# EAGLE board hyperion (EAGLE 5.10), part 1 of 4
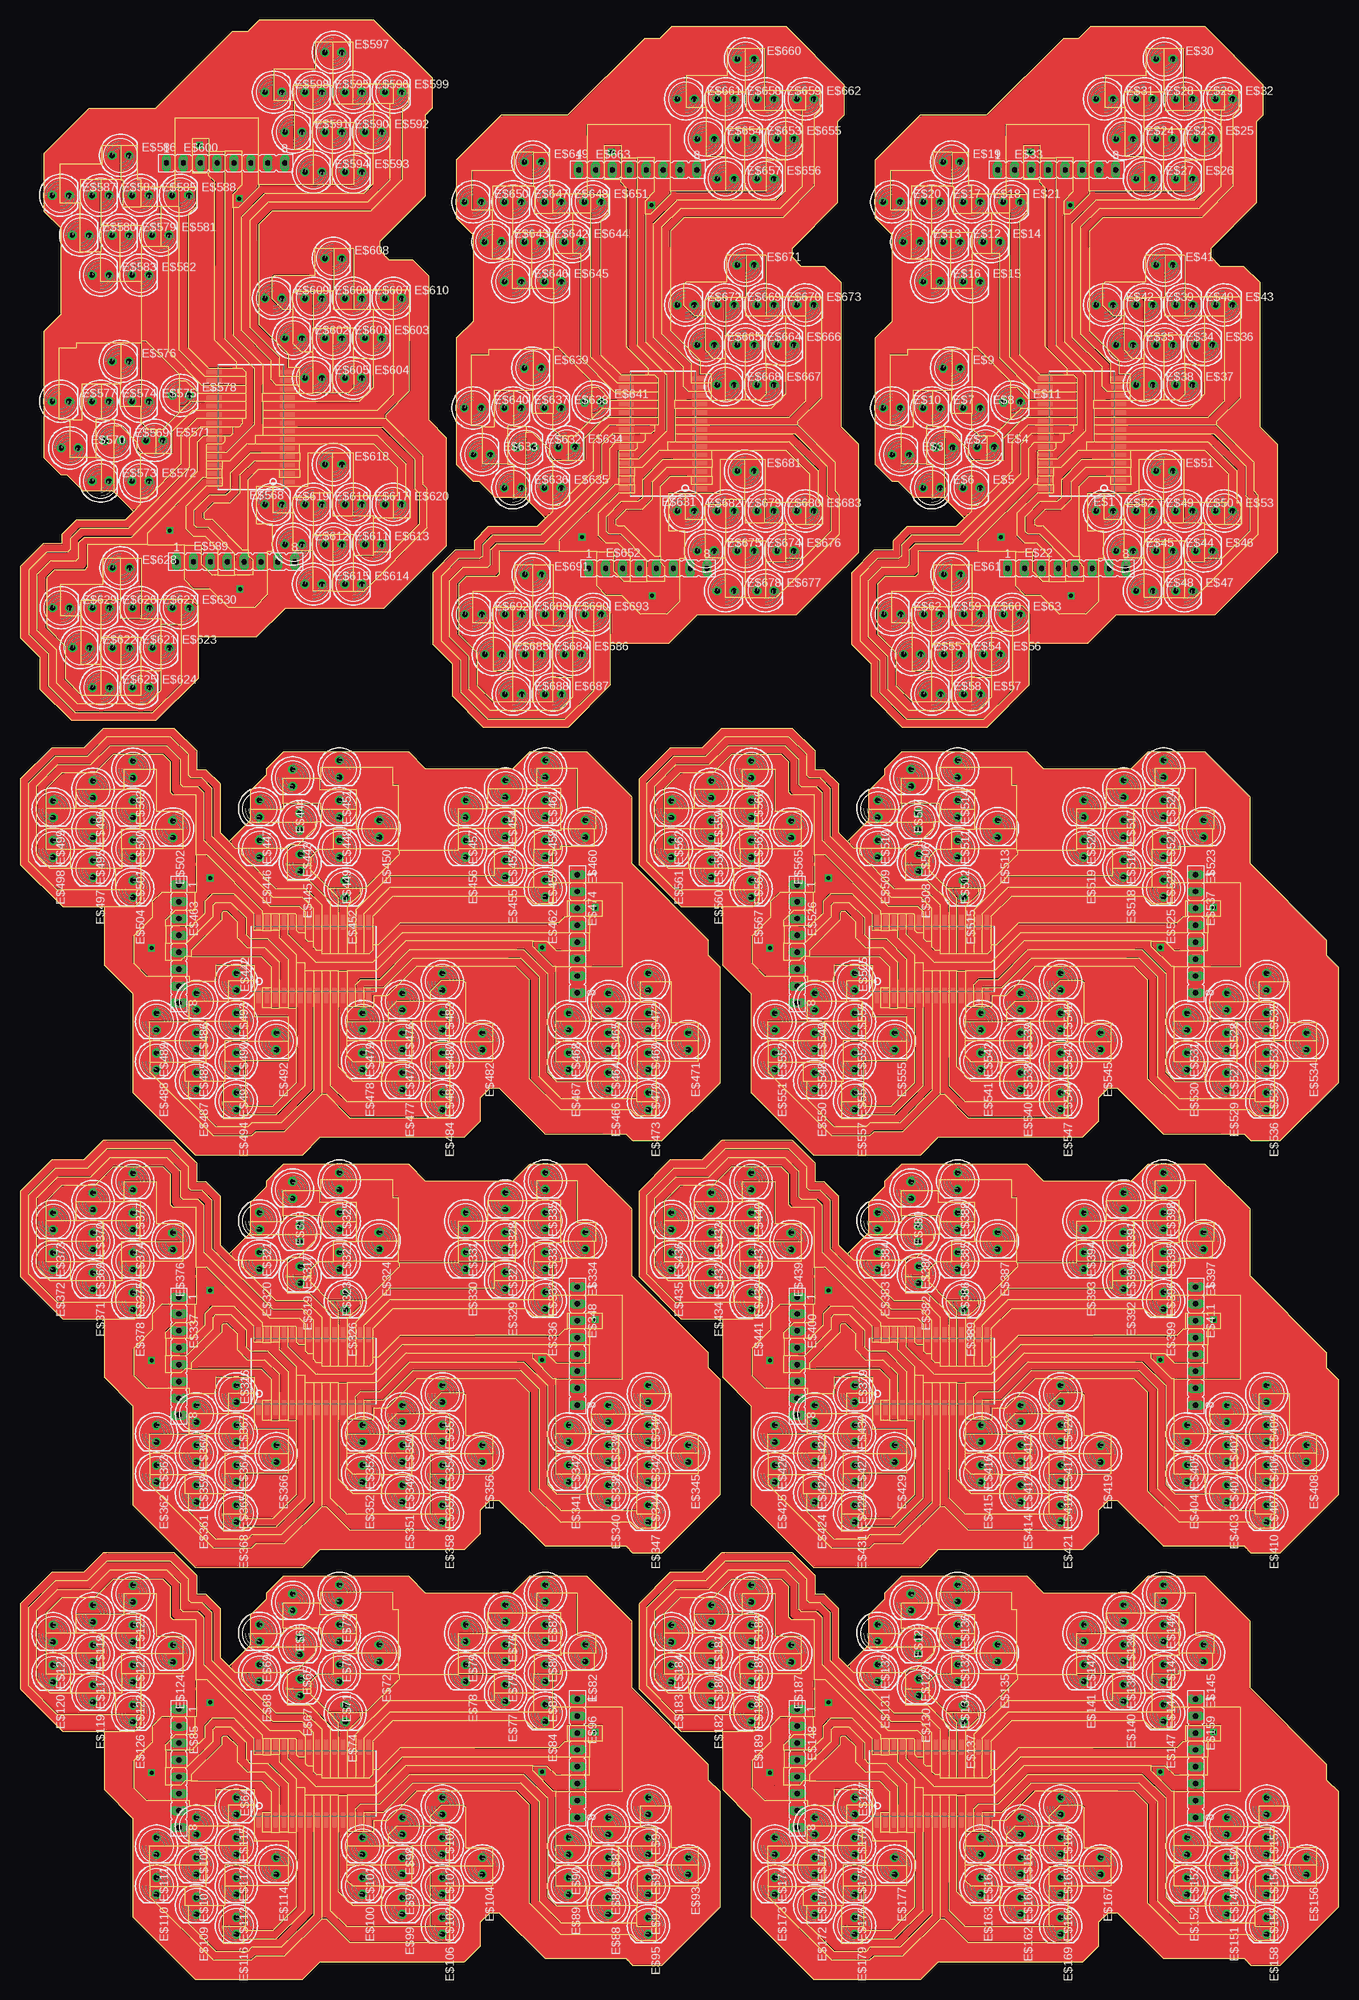
[diagram p0: board, top side]

Size 198.31 x 294.66 mm. Coordinates in mm from the lower left corner, seen from the top.
Outline: 4923 segments
Copper layers (1*16): Top 0.035mm / dielectric 1.5mm / Bottom 0.035mm
Design rules "default": minimum track width 10mil, minimum drill 24mil, track to track 8mil, track to pad 8mil, pad to pad 8mil, via to via 8mil, smd to smd 8mil, copper to edge 40mil, drill to drill 8mil, minimum pad ring 10mil, minimum via ring 8mil, stop-mask expansion 4mil, vias tented up to drill 0mil, thermal gap 10mil

## Footprints (pad centres in the part's own frame; a part is rotated, then mirrored left to right if it is on the bottom)
SOP28 = smd 0.6 x 2.2: 1 -8.255,-5.5; 2 -6.985,-5.5; 3 -5.715,-5.5; 4 -4.445,-5.5; 5 -3.175,-5.5; 6 -1.905,-5.5; 7 -0.635,-5.5; 8 0.635,-5.5; 9 1.905,-5.5; 10 3.175,-5.5; 11 4.445,-5.5; 12 5.715,-5.5; 13 6.985,-5.5; 14 8.255,-5.5; 15 8.255,5.5; 16 6.985,5.5; 17 5.715,5.5; 18 4.445,5.5; 19 3.175,5.5; 20 1.905,5.5; 21 0.635,5.5; 22 -0.635,5.5; 23 -1.905,5.5; 24 -3.175,5.5; 25 -4.445,5.5; 26 -5.715,5.5; 27 -6.985,5.5; 28 -8.255,5.5
LED5MM = drill 0.813 octagon: A -1.27,0; K 1.27,0
FE08 = drill 0.813 long: 1 -8.89,0; 2 -6.35,0; 3 -3.81,0; 4 -1.27,0; 5 1.27,0; 6 3.81,0; 7 6.35,0; 8 8.89,0

## Placement (x,y rotation side)
E$1  [SOP28]  159.67,232.45 90 top
E$2  [LED5MM]  138.99,230.4 0 top
E$3  [LED5MM]  132.42,229.32 0 top
E$4  [LED5MM]  145.18,230.46 0 top
E$5  [LED5MM]  143.07,224.34 0 top
E$6  [LED5MM]  137.07,224.34 0 top
E$7  [LED5MM]  137.07,236.34 0 top
E$8  [LED5MM]  143.07,236.34 0 top
E$9  [LED5MM]  140.07,242.34 0 top
E$10  [LED5MM]  131.07,236.34 0 top
E$11  [LED5MM]  149.13,237.23 0 top
E$12  [LED5MM]  140.07,261.32 0 top
E$13  [LED5MM]  134.07,261.32 0 top
E$14  [LED5MM]  146.07,261.32 0 top
E$15  [LED5MM]  143.07,255.33 0 top
E$16  [LED5MM]  137.07,255.33 0 top
E$17  [LED5MM]  137.07,267.32 0 top
E$18  [LED5MM]  143.07,267.32 0 top
E$19  [LED5MM]  140.07,273.32 0 top
E$20  [LED5MM]  131.07,267.32 0 top
E$21  [LED5MM]  149.07,267.32 0 top
E$22  [FE08]  157.4,212.21 0 top
E$23  [LED5MM]  172.07,276.82 0 top
E$24  [LED5MM]  166.07,276.82 0 top
E$25  [LED5MM]  178.07,276.82 0 top
E$26  [LED5MM]  175.07,270.82 0 top
E$27  [LED5MM]  169.07,270.82 0 top
E$28  [LED5MM]  169.07,282.82 0 top
E$29  [LED5MM]  175.07,282.82 0 top
E$30  [LED5MM]  172.07,288.82 0 top
E$31  [LED5MM]  163.07,282.82 0 top
E$32  [LED5MM]  181.07,282.82 0 top
E$33  [FE08]  155.88,272.16 0 top
E$34  [LED5MM]  172.07,245.83 0 top
E$35  [LED5MM]  166.07,245.83 0 top
E$36  [LED5MM]  178.07,245.83 0 top
E$37  [LED5MM]  175.07,239.83 0 top
E$38  [LED5MM]  169.07,239.83 0 top
E$39  [LED5MM]  169.07,251.83 0 top
E$40  [LED5MM]  175.07,251.83 0 top
E$41  [LED5MM]  172.07,257.83 0 top
E$42  [LED5MM]  163.07,251.83 0 top
E$43  [LED5MM]  181.07,251.83 0 top
E$44  [LED5MM]  172.07,214.84 0 top
E$45  [LED5MM]  166.07,214.84 0 top
E$46  [LED5MM]  178.07,214.84 0 top
E$47  [LED5MM]  175.07,208.84 0 top
E$48  [LED5MM]  169.07,208.84 0 top
E$49  [LED5MM]  169.07,220.84 0 top
E$50  [LED5MM]  175.07,220.84 0 top
E$51  [LED5MM]  172.07,226.84 0 top
E$52  [LED5MM]  163.07,220.84 0 top
E$53  [LED5MM]  181.07,220.84 0 top
E$54  [LED5MM]  140.13,199.29 0 top
E$55  [LED5MM]  134.13,199.29 0 top
E$56  [LED5MM]  146.13,199.29 0 top
E$57  [LED5MM]  143.13,193.29 0 top
E$58  [LED5MM]  137.13,193.29 0 top
E$59  [LED5MM]  137.13,205.29 0 top
E$60  [LED5MM]  143.13,205.29 0 top
E$61  [LED5MM]  140.13,211.29 0 top
E$62  [LED5MM]  131.13,205.29 0 top
E$63  [LED5MM]  149.13,205.29 0 top
E$64  [SOP28]  44.1,29.47 0 top
E$65  [LED5MM]  42.04,50.15 270 top
E$66  [LED5MM]  40.96,56.72 270 top
E$67  [LED5MM]  42.11,43.96 270 top
E$68  [LED5MM]  35.98,46.07 270 top
E$69  [LED5MM]  35.98,52.07 270 top
E$70  [LED5MM]  47.98,52.07 270 top
E$71  [LED5MM]  47.98,46.07 270 top
E$72  [LED5MM]  53.98,49.07 270 top
E$73  [LED5MM]  47.98,58.07 270 top
E$74  [LED5MM]  48.87,40 270 top
E$75  [LED5MM]  72.97,49.07 270 top
E$76  [LED5MM]  72.97,55.07 270 top
E$77  [LED5MM]  72.97,43.07 270 top
E$78  [LED5MM]  66.97,46.07 270 top
E$79  [LED5MM]  66.97,52.07 270 top
E$80  [LED5MM]  78.97,52.07 270 top
E$81  [LED5MM]  78.97,46.07 270 top
E$82  [LED5MM]  84.97,49.07 270 top
E$83  [LED5MM]  78.97,58.07 270 top
E$84  [LED5MM]  78.97,40.07 270 top
E$85  [FE08]  23.86,31.74 270 top
E$86  [LED5MM]  88.46,17.06 270 top
E$87  [LED5MM]  88.46,23.06 270 top
E$88  [LED5MM]  88.46,11.06 270 top
E$89  [LED5MM]  82.46,14.06 270 top
E$90  [LED5MM]  82.46,20.06 270 top
E$91  [LED5MM]  94.46,20.06 270 top
E$92  [LED5MM]  94.46,14.06 270 top
E$93  [LED5MM]  100.46,17.06 270 top
E$94  [LED5MM]  94.46,26.06 270 top
E$95  [LED5MM]  94.46,8.06 270 top
E$96  [FE08]  83.8,33.26 270 top
E$97  [LED5MM]  57.47,17.06 270 top
E$98  [LED5MM]  57.47,23.06 270 top
E$99  [LED5MM]  57.47,11.06 270 top
E$100  [LED5MM]  51.47,14.06 270 top
E$101  [LED5MM]  51.47,20.06 270 top
E$102  [LED5MM]  63.47,20.06 270 top
E$103  [LED5MM]  63.47,14.06 270 top
E$104  [LED5MM]  69.47,17.06 270 top
E$105  [LED5MM]  63.47,26.06 270 top
E$106  [LED5MM]  63.47,8.06 270 top
E$107  [LED5MM]  26.49,17.06 270 top
E$108  [LED5MM]  26.49,23.06 270 top
E$109  [LED5MM]  26.49,11.06 270 top
E$110  [LED5MM]  20.49,14.06 270 top
E$111  [LED5MM]  20.49,20.06 270 top
E$112  [LED5MM]  32.49,20.06 270 top
E$113  [LED5MM]  32.49,14.06 270 top
E$114  [LED5MM]  38.49,17.06 270 top
E$115  [LED5MM]  32.49,26.06 270 top
E$116  [LED5MM]  32.49,8.06 270 top
E$117  [LED5MM]  10.93,49 270 top
E$118  [LED5MM]  10.93,55 270 top
E$119  [LED5MM]  10.93,43 270 top
E$120  [LED5MM]  4.93,46 270 top
E$121  [LED5MM]  4.93,52 270 top
E$122  [LED5MM]  16.93,52 270 top
E$123  [LED5MM]  16.93,46 270 top
E$124  [LED5MM]  22.93,49 270 top
E$125  [LED5MM]  16.93,58 270 top
E$126  [LED5MM]  16.93,40 270 top
E$127  [SOP28]  137.1,29.47 0 top
E$128  [LED5MM]  135.04,50.15 270 top
E$129  [LED5MM]  133.96,56.72 270 top
E$130  [LED5MM]  135.11,43.96 270 top
E$131  [LED5MM]  128.98,46.07 270 top
E$132  [LED5MM]  128.98,52.07 270 top
E$133  [LED5MM]  140.98,52.07 270 top
E$134  [LED5MM]  140.98,46.07 270 top
E$135  [LED5MM]  146.98,49.07 270 top
E$136  [LED5MM]  140.98,58.07 270 top
E$137  [LED5MM]  141.87,40 270 top
E$138  [LED5MM]  165.97,49.07 270 top
E$139  [LED5MM]  165.97,55.07 270 top
E$140  [LED5MM]  165.97,43.07 270 top
E$141  [LED5MM]  159.97,46.07 270 top
E$142  [LED5MM]  159.97,52.07 270 top
E$143  [LED5MM]  171.97,52.07 270 top
E$144  [LED5MM]  171.97,46.07 270 top
E$145  [LED5MM]  177.97,49.07 270 top
E$146  [LED5MM]  171.97,58.07 270 top
E$147  [LED5MM]  171.97,40.07 270 top
E$148  [FE08]  116.85,31.74 270 top
E$149  [LED5MM]  181.46,17.06 270 top
E$150  [LED5MM]  181.46,23.06 270 top
E$151  [LED5MM]  181.46,11.06 270 top
E$152  [LED5MM]  175.46,14.06 270 top
E$153  [LED5MM]  175.46,20.06 270 top
E$154  [LED5MM]  187.46,20.06 270 top
E$155  [LED5MM]  187.46,14.06 270 top
E$156  [LED5MM]  193.46,17.06 270 top
E$157  [LED5MM]  187.46,26.06 270 top
E$158  [LED5MM]  187.46,8.06 270 top
E$159  [FE08]  176.8,33.26 270 top
E$160  [LED5MM]  150.47,17.06 270 top
E$161  [LED5MM]  150.47,23.06 270 top
E$162  [LED5MM]  150.47,11.06 270 top
E$163  [LED5MM]  144.47,14.06 270 top
E$164  [LED5MM]  144.47,20.06 270 top
E$165  [LED5MM]  156.47,20.06 270 top
E$166  [LED5MM]  156.47,14.06 270 top
E$167  [LED5MM]  162.47,17.06 270 top
E$168  [LED5MM]  156.47,26.06 270 top
E$169  [LED5MM]  156.47,8.06 270 top
E$170  [LED5MM]  119.49,17.06 270 top
E$171  [LED5MM]  119.49,23.06 270 top
E$172  [LED5MM]  119.49,11.06 270 top
E$173  [LED5MM]  113.49,14.06 270 top
E$174  [LED5MM]  113.49,20.06 270 top
E$175  [LED5MM]  125.49,20.06 270 top
E$176  [LED5MM]  125.49,14.06 270 top
E$177  [LED5MM]  131.49,17.06 270 top
E$178  [LED5MM]  125.49,26.06 270 top
E$179  [LED5MM]  125.49,8.06 270 top
E$180  [LED5MM]  103.93,49 270 top
E$181  [LED5MM]  103.93,55 270 top
E$182  [LED5MM]  103.93,43 270 top
E$183  [LED5MM]  97.93,46 270 top
E$184  [LED5MM]  97.93,52 270 top
E$185  [LED5MM]  109.93,52 270 top
E$186  [LED5MM]  109.93,46 270 top
E$187  [LED5MM]  115.93,49 270 top
E$188  [LED5MM]  109.93,58 270 top
E$189  [LED5MM]  109.93,40 270 top
E$316  [SOP28]  44.1,91.47 0 top
E$317  [LED5MM]  42.04,112.15 270 top
E$318  [LED5MM]  40.96,118.72 270 top
E$319  [LED5MM]  42.11,105.95 270 top
E$320  [LED5MM]  35.98,108.07 270 top
E$321  [LED5MM]  35.98,114.07 270 top
E$322  [LED5MM]  47.98,114.07 270 top
E$323  [LED5MM]  47.98,108.07 270 top
E$324  [LED5MM]  53.98,111.07 270 top
E$325  [LED5MM]  47.98,120.07 270 top
E$326  [LED5MM]  48.87,102 270 top
E$327  [LED5MM]  72.97,111.07 270 top
E$328  [LED5MM]  72.97,117.07 270 top
E$329  [LED5MM]  72.97,105.07 270 top
E$330  [LED5MM]  66.97,108.07 270 top
E$331  [LED5MM]  66.97,114.07 270 top
E$332  [LED5MM]  78.97,114.07 270 top
E$333  [LED5MM]  78.97,108.07 270 top
E$334  [LED5MM]  84.97,111.07 270 top
E$335  [LED5MM]  78.97,120.07 270 top
E$336  [LED5MM]  78.97,102.07 270 top
E$337  [FE08]  23.86,93.74 270 top
E$338  [LED5MM]  88.46,79.06 270 top
E$339  [LED5MM]  88.46,85.06 270 top
E$340  [LED5MM]  88.46,73.06 270 top
E$341  [LED5MM]  82.46,76.06 270 top
E$342  [LED5MM]  82.46,82.06 270 top
E$343  [LED5MM]  94.46,82.06 270 top
E$344  [LED5MM]  94.46,76.06 270 top
E$345  [LED5MM]  100.46,79.06 270 top
E$346  [LED5MM]  94.46,88.06 270 top
E$347  [LED5MM]  94.46,70.06 270 top
E$348  [FE08]  83.8,95.26 270 top
E$349  [LED5MM]  57.47,79.06 270 top
E$350  [LED5MM]  57.47,85.06 270 top
E$351  [LED5MM]  57.47,73.06 270 top
E$352  [LED5MM]  51.47,76.06 270 top
E$353  [LED5MM]  51.47,82.06 270 top
E$354  [LED5MM]  63.47,82.06 270 top
E$355  [LED5MM]  63.47,76.06 270 top
E$356  [LED5MM]  69.47,79.06 270 top
E$357  [LED5MM]  63.47,88.06 270 top
E$358  [LED5MM]  63.47,70.06 270 top
E$359  [LED5MM]  26.49,79.06 270 top
E$360  [LED5MM]  26.49,85.06 270 top
E$361  [LED5MM]  26.49,73.06 270 top
E$362  [LED5MM]  20.49,76.06 270 top
E$363  [LED5MM]  20.49,82.06 270 top
E$364  [LED5MM]  32.49,82.06 270 top
E$365  [LED5MM]  32.49,76.06 270 top
E$366  [LED5MM]  38.49,79.06 270 top
E$367  [LED5MM]  32.49,88.06 270 top
E$368  [LED5MM]  32.49,70.06 270 top
E$369  [LED5MM]  10.93,111 270 top
E$370  [LED5MM]  10.93,117 270 top
E$371  [LED5MM]  10.93,105 270 top
E$372  [LED5MM]  4.93,108 270 top
E$373  [LED5MM]  4.93,114 270 top
E$374  [LED5MM]  16.93,114 270 top
E$375  [LED5MM]  16.93,108 270 top
E$376  [LED5MM]  22.93,111 270 top
E$377  [LED5MM]  16.93,120 270 top
E$378  [LED5MM]  16.93,102 270 top
E$379  [SOP28]  137.1,91.47 0 top
E$380  [LED5MM]  135.04,112.15 270 top
E$381  [LED5MM]  133.96,118.72 270 top
E$382  [LED5MM]  135.11,105.95 270 top
E$383  [LED5MM]  128.98,108.07 270 top
E$384  [LED5MM]  128.98,114.07 270 top
E$385  [LED5MM]  140.98,114.07 270 top
E$386  [LED5MM]  140.98,108.07 270 top
E$387  [LED5MM]  146.98,111.07 270 top
E$388  [LED5MM]  140.98,120.07 270 top
E$389  [LED5MM]  141.87,102 270 top
E$390  [LED5MM]  165.97,111.07 270 top
E$391  [LED5MM]  165.97,117.07 270 top
E$392  [LED5MM]  165.97,105.07 270 top
E$393  [LED5MM]  159.97,108.07 270 top
E$394  [LED5MM]  159.97,114.07 270 top
E$395  [LED5MM]  171.97,114.07 270 top
E$396  [LED5MM]  171.97,108.07 270 top
E$397  [LED5MM]  177.97,111.07 270 top
E$398  [LED5MM]  171.97,120.07 270 top
E$399  [LED5MM]  171.97,102.07 270 top
E$400  [FE08]  116.85,93.74 270 top
E$401  [LED5MM]  181.46,79.06 270 top
E$402  [LED5MM]  181.46,85.06 270 top
E$403  [LED5MM]  181.46,73.06 270 top
E$404  [LED5MM]  175.46,76.06 270 top
E$405  [LED5MM]  175.46,82.06 270 top
E$406  [LED5MM]  187.46,82.06 270 top
E$407  [LED5MM]  187.46,76.06 270 top
E$408  [LED5MM]  193.46,79.06 270 top
E$409  [LED5MM]  187.46,88.06 270 top
E$410  [LED5MM]  187.46,70.06 270 top
E$411  [FE08]  176.8,95.26 270 top
E$412  [LED5MM]  150.47,79.06 270 top
E$413  [LED5MM]  150.47,85.06 270 top
E$414  [LED5MM]  150.47,73.06 270 top
E$415  [LED5MM]  144.47,76.06 270 top
E$416  [LED5MM]  144.47,82.06 270 top
E$417  [LED5MM]  156.47,82.06 270 top
E$418  [LED5MM]  156.47,76.06 270 top
E$419  [LED5MM]  162.47,79.06 270 top
E$420  [LED5MM]  156.47,88.06 270 top
E$421  [LED5MM]  156.47,70.06 270 top
E$422  [LED5MM]  119.49,79.06 270 top
E$423  [LED5MM]  119.49,85.06 270 top
E$424  [LED5MM]  119.49,73.06 270 top
E$425  [LED5MM]  113.49,76.06 270 top
E$426  [LED5MM]  113.49,82.06 270 top
E$427  [LED5MM]  125.49,82.06 270 top
E$428  [LED5MM]  125.49,76.06 270 top
E$429  [LED5MM]  131.49,79.06 270 top
E$430  [LED5MM]  125.49,88.06 270 top
E$431  [LED5MM]  125.49,70.06 270 top
E$432  [LED5MM]  103.93,111 270 top
E$433  [LED5MM]  103.93,117 270 top
E$434  [LED5MM]  103.93,105 270 top
E$435  [LED5MM]  97.93,108 270 top
E$436  [LED5MM]  97.93,114 270 top
E$437  [LED5MM]  109.93,114 270 top
E$438  [LED5MM]  109.93,108 270 top
E$439  [LED5MM]  115.93,111 270 top
E$440  [LED5MM]  109.93,120 270 top
E$441  [LED5MM]  109.93,102 270 top
E$442  [SOP28]  44.1,153.47 0 top
E$443  [LED5MM]  42.04,174.15 270 top
E$444  [LED5MM]  40.96,180.72 270 top
E$445  [LED5MM]  42.11,167.96 270 top
E$446  [LED5MM]  35.98,170.07 270 top
E$447  [LED5MM]  35.98,176.07 270 top
E$448  [LED5MM]  47.98,176.07 270 top
E$449  [LED5MM]  47.98,170.07 270 top
E$450  [LED5MM]  53.98,173.07 270 top
E$451  [LED5MM]  47.98,182.07 270 top
E$452  [LED5MM]  48.87,164 270 top
E$453  [LED5MM]  72.97,173.07 270 top
E$454  [LED5MM]  72.97,179.07 270 top
E$455  [LED5MM]  72.97,167.07 270 top
E$456  [LED5MM]  66.97,170.07 270 top
E$457  [LED5MM]  66.97,176.07 270 top
E$458  [LED5MM]  78.97,176.07 270 top
E$459  [LED5MM]  78.97,170.07 270 top
E$460  [LED5MM]  84.97,173.07 270 top
E$461  [LED5MM]  78.97,182.07 270 top
E$462  [LED5MM]  78.97,164.07 270 top
E$463  [FE08]  23.86,155.74 270 top
E$464  [LED5MM]  88.46,141.06 270 top
E$465  [LED5MM]  88.46,147.06 270 top
E$466  [LED5MM]  88.46,135.06 270 top
E$467  [LED5MM]  82.46,138.06 270 top
E$468  [LED5MM]  82.46,144.06 270 top
E$469  [LED5MM]  94.46,144.06 270 top
E$470  [LED5MM]  94.46,138.06 270 top
E$471  [LED5MM]  100.46,141.06 270 top
E$472  [LED5MM]  94.46,150.06 270 top
E$473  [LED5MM]  94.46,132.06 270 top
E$474  [FE08]  83.8,157.26 270 top
E$475  [LED5MM]  57.47,141.06 270 top
E$476  [LED5MM]  57.47,147.06 270 top
E$477  [LED5MM]  57.47,135.06 270 top
E$478  [LED5MM]  51.47,138.06 270 top
E$479  [LED5MM]  51.47,144.06 270 top
E$480  [LED5MM]  63.47,144.06 270 top
E$481  [LED5MM]  63.47,138.06 270 top
E$482  [LED5MM]  69.47,141.06 270 top
E$483  [LED5MM]  63.47,150.06 270 top
E$484  [LED5MM]  63.47,132.06 270 top
E$485  [LED5MM]  26.49,141.06 270 top
E$486  [LED5MM]  26.49,147.06 270 top
E$487  [LED5MM]  26.49,135.06 270 top
E$488  [LED5MM]  20.49,138.06 270 top
E$489  [LED5MM]  20.49,144.06 270 top
E$490  [LED5MM]  32.49,144.06 270 top
E$491  [LED5MM]  32.49,138.06 270 top
E$492  [LED5MM]  38.49,141.06 270 top
E$493  [LED5MM]  32.49,150.06 270 top
E$494  [LED5MM]  32.49,132.06 270 top
E$495  [LED5MM]  10.93,173 270 top
E$496  [LED5MM]  10.93,179 270 top
E$497  [LED5MM]  10.93,167 270 top
E$498  [LED5MM]  4.93,170 270 top
E$499  [LED5MM]  4.93,176 270 top
E$500  [LED5MM]  16.93,176 270 top
E$501  [LED5MM]  16.93,170 270 top
E$502  [LED5MM]  22.93,173 270 top
E$503  [LED5MM]  16.93,182 270 top
E$504  [LED5MM]  16.93,164 270 top
E$505  [SOP28]  137.1,153.47 0 top
E$506  [LED5MM]  135.04,174.15 270 top
E$507  [LED5MM]  133.96,180.72 270 top
E$508  [LED5MM]  135.11,167.96 270 top
E$509  [LED5MM]  128.98,170.07 270 top
E$510  [LED5MM]  128.98,176.07 270 top
E$511  [LED5MM]  140.98,176.07 270 top
E$512  [LED5MM]  140.98,170.07 270 top
E$513  [LED5MM]  146.98,173.07 270 top
E$514  [LED5MM]  140.98,182.07 270 top
E$515  [LED5MM]  141.87,164 270 top
E$516  [LED5MM]  165.97,173.07 270 top
E$517  [LED5MM]  165.97,179.07 270 top
E$518  [LED5MM]  165.97,167.07 270 top
E$519  [LED5MM]  159.97,170.07 270 top
E$520  [LED5MM]  159.97,176.07 270 top
E$521  [LED5MM]  171.97,176.07 270 top
E$522  [LED5MM]  171.97,170.07 270 top
E$523  [LED5MM]  177.97,173.07 270 top
E$524  [LED5MM]  171.97,182.07 270 top
E$525  [LED5MM]  171.97,164.07 270 top
E$526  [FE08]  116.85,155.74 270 top
E$527  [LED5MM]  181.46,141.06 270 top
E$528  [LED5MM]  181.46,147.06 270 top
E$529  [LED5MM]  181.46,135.06 270 top
E$530  [LED5MM]  175.46,138.06 270 top
E$531  [LED5MM]  175.46,144.06 270 top
E$532  [LED5MM]  187.46,144.06 270 top
E$533  [LED5MM]  187.46,138.06 270 top
E$534  [LED5MM]  193.46,141.06 270 top
E$535  [LED5MM]  187.46,150.06 270 top
E$536  [LED5MM]  187.46,132.06 270 top
E$537  [FE08]  176.8,157.26 270 top
E$538  [LED5MM]  150.47,141.06 270 top
E$539  [LED5MM]  150.47,147.06 270 top
E$540  [LED5MM]  150.47,135.06 270 top
E$541  [LED5MM]  144.47,138.06 270 top
E$542  [LED5MM]  144.47,144.06 270 top
E$543  [LED5MM]  156.47,144.06 270 top
E$544  [LED5MM]  156.47,138.06 270 top
E$545  [LED5MM]  162.47,141.06 270 top
E$546  [LED5MM]  156.47,150.06 270 top
E$547  [LED5MM]  156.47,132.06 270 top
E$548  [LED5MM]  119.49,141.06 270 top
E$549  [LED5MM]  119.49,147.06 270 top
E$550  [LED5MM]  119.49,135.06 270 top
E$551  [LED5MM]  113.49,138.06 270 top
E$552  [LED5MM]  113.49,144.06 270 top
E$553  [LED5MM]  125.49,144.06 270 top
E$554  [LED5MM]  125.49,138.06 270 top
E$555  [LED5MM]  131.49,141.06 270 top
E$556  [LED5MM]  125.49,150.06 270 top
E$557  [LED5MM]  125.49,132.06 270 top
E$558  [LED5MM]  103.93,173 270 top
E$559  [LED5MM]  103.93,179 270 top
E$560  [LED5MM]  103.93,167 270 top
E$561  [LED5MM]  97.93,170 270 top
E$562  [LED5MM]  97.93,176 270 top
E$563  [LED5MM]  109.93,176 270 top
E$564  [LED5MM]  109.93,170 270 top
E$565  [LED5MM]  115.93,173 270 top
E$566  [LED5MM]  109.93,182 270 top
E$567  [LED5MM]  109.93,164 270 top
E$568  [SOP28]  34.67,233.45 90 top
E$569  [LED5MM]  13.99,231.4 0 top
E$570  [LED5MM]  7.42,230.32 0 top
E$571  [LED5MM]  20.18,231.46 0 top
E$572  [LED5MM]  18.07,225.34 0 top
E$573  [LED5MM]  12.07,225.34 0 top
E$574  [LED5MM]  12.07,237.34 0 top
E$575  [LED5MM]  18.07,237.34 0 top
E$576  [LED5MM]  15.07,243.34 0 top
E$577  [LED5MM]  6.07,237.34 0 top
E$578  [LED5MM]  24.13,238.23 0 top
E$579  [LED5MM]  15.07,262.32 0 top
E$580  [LED5MM]  9.07,262.32 0 top
E$581  [LED5MM]  21.07,262.32 0 top
E$582  [LED5MM]  18.07,256.32 0 top
E$583  [LED5MM]  12.07,256.32 0 top
E$584  [LED5MM]  12.07,268.32 0 top
E$585  [LED5MM]  18.07,268.32 0 top
E$586  [LED5MM]  15.07,274.32 0 top
E$587  [LED5MM]  6.07,268.32 0 top
E$588  [LED5MM]  24.07,268.32 0 top
E$589  [FE08]  32.4,213.21 0 top
E$590  [LED5MM]  47.07,277.82 0 top
E$591  [LED5MM]  41.07,277.82 0 top
E$592  [LED5MM]  53.07,277.82 0 top
E$593  [LED5MM]  50.07,271.82 0 top
E$594  [LED5MM]  44.07,271.82 0 top
E$595  [LED5MM]  44.07,283.82 0 top
E$596  [LED5MM]  50.07,283.82 0 top
E$597  [LED5MM]  47.07,289.82 0 top
E$598  [LED5MM]  38.07,283.82 0 top
E$599  [LED5MM]  56.07,283.82 0 top
E$600  [FE08]  30.88,273.16 0 top
E$601  [LED5MM]  47.07,246.83 0 top
E$602  [LED5MM]  41.07,246.83 0 top
E$603  [LED5MM]  53.07,246.83 0 top
E$604  [LED5MM]  50.07,240.83 0 top
E$605  [LED5MM]  44.07,240.83 0 top
E$606  [LED5MM]  44.07,252.83 0 top
E$607  [LED5MM]  50.07,252.83 0 top
E$608  [LED5MM]  47.07,258.83 0 top
E$609  [LED5MM]  38.07,252.83 0 top
E$610  [LED5MM]  56.07,252.83 0 top
E$611  [LED5MM]  47.07,215.84 0 top
E$612  [LED5MM]  41.07,215.84 0 top
E$613  [LED5MM]  53.07,215.84 0 top
E$614  [LED5MM]  50.07,209.84 0 top
E$615  [LED5MM]  44.07,209.84 0 top
E$616  [LED5MM]  44.07,221.84 0 top
E$617  [LED5MM]  50.07,221.84 0 top
E$618  [LED5MM]  47.07,227.84 0 top
E$619  [LED5MM]  38.07,221.84 0 top
E$620  [LED5MM]  56.07,221.84 0 top
E$621  [LED5MM]  15.13,200.29 0 top
E$622  [LED5MM]  9.13,200.29 0 top
E$623  [LED5MM]  21.13,200.29 0 top
E$624  [LED5MM]  18.13,194.29 0 top
E$625  [LED5MM]  12.13,194.29 0 top
E$626  [LED5MM]  12.13,206.29 0 top
E$627  [LED5MM]  18.13,206.29 0 top
E$628  [LED5MM]  15.13,212.29 0 top
E$629  [LED5MM]  6.13,206.29 0 top
E$630  [LED5MM]  24.13,206.29 0 top
E$631  [SOP28]  96.66,232.45 90 top
E$632  [LED5MM]  75.99,230.4 0 top
E$633  [LED5MM]  69.42,229.32 0 top
E$634  [LED5MM]  82.18,230.46 0 top
E$635  [LED5MM]  80.07,224.34 0 top
E$636  [LED5MM]  74.07,224.34 0 top
E$637  [LED5MM]  74.07,236.34 0 top
E$638  [LED5MM]  80.07,236.34 0 top
E$639  [LED5MM]  77.07,242.34 0 top
E$640  [LED5MM]  68.07,236.34 0 top
E$641  [LED5MM]  86.13,237.23 0 top
E$642  [LED5MM]  77.07,261.32 0 top
E$643  [LED5MM]  71.07,261.32 0 top
E$644  [LED5MM]  83.07,261.32 0 top
E$645  [LED5MM]  80.07,255.33 0 top
E$646  [LED5MM]  74.07,255.33 0 top
E$647  [LED5MM]  74.07,267.32 0 top
E$648  [LED5MM]  80.07,267.32 0 top
E$649  [LED5MM]  77.07,273.32 0 top
E$650  [LED5MM]  68.07,267.32 0 top
E$651  [LED5MM]  86.07,267.32 0 top
E$652  [FE08]  94.4,212.21 0 top
E$653  [LED5MM]  109.07,276.82 0 top
E$654  [LED5MM]  103.07,276.82 0 top
E$655  [LED5MM]  115.07,276.82 0 top
E$656  [LED5MM]  112.07,270.82 0 top
E$657  [LED5MM]  106.07,270.82 0 top
E$658  [LED5MM]  106.07,282.82 0 top
E$659  [LED5MM]  112.07,282.82 0 top
E$660  [LED5MM]  109.07,288.82 0 top
E$661  [LED5MM]  100.07,282.82 0 top
E$662  [LED5MM]  118.07,282.82 0 top
E$663  [FE08]  92.88,272.16 0 top
E$664  [LED5MM]  109.07,245.83 0 top
E$665  [LED5MM]  103.07,245.83 0 top
E$666  [LED5MM]  115.07,245.83 0 top
E$667  [LED5MM]  112.07,239.83 0 top
E$668  [LED5MM]  106.07,239.83 0 top
E$669  [LED5MM]  106.07,251.83 0 top
E$670  [LED5MM]  112.07,251.83 0 top
E$671  [LED5MM]  109.07,257.83 0 top
E$672  [LED5MM]  100.07,251.83 0 top
E$673  [LED5MM]  118.07,251.83 0 top
E$674  [LED5MM]  109.07,214.84 0 top
E$675  [LED5MM]  103.07,214.84 0 top
E$676  [LED5MM]  115.07,214.84 0 top
E$677  [LED5MM]  112.07,208.84 0 top
E$678  [LED5MM]  106.07,208.84 0 top
E$679  [LED5MM]  106.07,220.84 0 top
E$680  [LED5MM]  112.07,220.84 0 top
E$681  [LED5MM]  109.07,226.84 0 top
E$682  [LED5MM]  100.07,220.84 0 top
E$683  [LED5MM]  118.07,220.84 0 top
E$684  [LED5MM]  77.13,199.29 0 top
E$685  [LED5MM]  71.13,199.29 0 top
E$686  [LED5MM]  83.13,199.29 0 top
E$687  [LED5MM]  80.13,193.29 0 top
E$688  [LED5MM]  74.13,193.29 0 top
E$689  [LED5MM]  74.13,205.29 0 top
E$690  [LED5MM]  80.13,205.29 0 top
E$691  [LED5MM]  77.13,211.29 0 top
E$692  [LED5MM]  68.13,205.29 0 top
E$693  [LED5MM]  86.13,205.29 0 top

## Library data of the parts
E$1 E$64 E$127 E$316 E$379 E$442 E$505 E$568 E$631 = memory-sram
E$2-E$21 E$23-E$32 E$34-E$63 E$65-E$84 E$86-E$95 E$97-E$126 E$128-E$147 E$149-E$158 E$160-E$189 E$317-E$336 E$338-E$347 E$349-E$378 E$380-E$399 E$401-E$410 E$412-E$441 E$443-E$462 E$464-E$473 E$475-E$504 E$506-E$525 E$527-E$536 E$538-E$567 E$569-E$588 E$590-E$599 E$601-E$630 E$632-E$651 E$653-E$662 E$664-E$693 = led
E$22 E$33 E$85 E$96 E$148 E$159 E$337 E$348 E$400 E$411 E$463 E$474 E$526 E$537 E$589 E$600 E$652 E$663 = con-lsta

## Tracks (layer width: path | path; a pad name or v marks a point on that pad's centre or on a via)
S$1
  Top 1.143: 155.11,228.02 156.26,228.02 160.76,232.53 160.76,239.64
S$2
  Top 1.143: 161.65,229.29 159.37,229.29 156.07,225.99 156.07,225.42
S$3
  Top 1.143: 164.7,226.75 160.51,226.75 158.61,224.85 158.61,222.31 156.7,220.4 154.29,220.4 153.08,219.2 154.1,219.2 158.61,214.69 158.61,222.25
S$4
  Top 1.143: 160.76,241.68 156.32,246.12
S$5
  Top 1.143: 149.59,244.15 149.59,266.44 | 149.59,244.15 153.02,240.72 153.53,240.72 | 149.59,244.15 149.53,244.22 149.53,265.42
S$6
  Top 1.143: 147.87,262.5 147.87,244.09 152.51,239.45 154.03,239.45
S$7
  Top 1.143: 182.86,250.19 182.86,238.18 179.05,234.37 173.85,234.37
S$8
  Top 1.143: 180.01,244.66 180.01,239.45 176.2,235.64 | 176.2,235.64 168.51,235.64 | 176.2,235.64 178.48,235.64 180.45,237.61 180.45,237.99
S$9
  Top 1.143: 174.54,236.91 176.77,239.14 | 174.54,236.91 166.03,236.91 | 174.54,236.91 175.69,236.91 177.21,238.44 177.21,240.85
S$10
  Top 1.143: 164.51,243.26 160.13,247.65 160.13,248.15
S$11
  Top 1.143: 164.57,243.2 164.57,241.1
S$12
  Top 1.143: 164.96,239.45 163.69,239.45 163.31,239.84 163.31,240.66
S$13
  Top 1.143: 163.31,240.85 163.31,242.69 158.86,247.14
S$14
  Top 1.143: 164.45,238.18 163.11,238.18 162.03,239.26 162.03,242.18 157.59,246.63
S$15
  Top 1.143: 154.73,229.29 155.69,229.29 159.5,233.1 159.5,241.17 155.05,245.61
S$16
  Top 1.143: 147.75,236.34 144.38,236.34
S$17
  Top 1.143: 141.46,242.31 141.46,236.6 141.72,236.34
S$18
  Top 1.143: 132.25,236.22 132.25,238.56 136.06,242.38 138.73,242.38
S$19
  Top 1.143: 157.59,262.76 157.59,264.41 161.4,268.22 175.37,268.22 | 175.37,268.22 176.32,269.17 176.32,270.63 | 175.37,268.22 176.51,268.22 177.4,269.11 177.4,272.47
S$20
  Top 1.143: 158.86,261.68 158.86,263.77 162.03,266.95 177.02,266.95 179.94,269.93 179.94,270.5
S$21
  Top 1.143: 160.13,260.47 160.13,263.2 162.61,265.68 177.53,265.68 181.72,269.87 181.72,270.19
S$22
  Top 1.143: 131.87,232.91 129.4,232.91
S$23
  Top 1.143: 144.76,230.31 144.45,230.31 138.41,236.34
S$24
  Top 1.143: 141.91,224.34 141.91,229.87 141.33,230.44
S$25
  Top 1.143: 138.29,224.28 138.29,229.8
S$26
  Top 1.143: 152.89,236.91 150.16,236.91 149.59,236.34 149.59,238.82 151.37,237.04
S$27
  Top 1.143: 144.45,224.47 144.45,224.34
S$28
  Top 1.143: 153.72,230.56 152.76,230.56 152.32,230.12
S$29
  Top 1.143: 153.4,231.83 152.26,231.83 151.05,230.63
S$30
  Top 1.143: 152.95,234.37 151.24,234.37 148.51,231.64 148.51,228.28 144.57,224.34
S$31
  Top 1.143: 153.27,233.1 151.75,233.1 149.78,231.14 149.78,226.56 141.08,217.93
S$32
  Top 1.143: 165.27,224.21 160.19,224.21 159.88,223.9 | 159.88,223.9 159.88,221.74 | 159.88,223.9 159.88,224.34 161.02,225.48 161.21,225.48
S$33
  Top 1.143: 160.76,214.37 161.02,214.62 161.02,216.47 159.88,217.61 | 159.88,217.61 159.88,221.67 | 159.88,217.61 159.88,213.42 160.38,212.91
S$34
  Top 1.143: 165.91,230.56 178.54,230.56 182.35,226.75 182.35,220.98
S$35
  Top 1.143: 166.1,231.83 178.99,231.83 183.62,227.33 183.62,223.01 184.26,222.37 184.26,218.12 181.34,215.2 179.37,215.2 179.31,215.26
S$36
  Top 1.143: 155.37,214.37 155.37,212.21 | 155.37,214.37 153.08,216.66 151.24,216.66 150.54,217.36 150.54,220.28 153.21,222.94 155.62,222.94 156.07,223.39 156.07,225.29 | 156.64,212.28 156.64,213.1 155.37,214.37
S$37
  Top 1.143: 156,212.97 156,212.66 155.88,212.53
S$38
  Top 1.143: 157.91,220.66 157.91,216.34 158.03,216.21
S$39
  Top 1.143: 157.21,217.17 157.21,220.59
S$40
  Top 1.143: 156.45,219.96 156.45,217.74 156.7,217.48
S$41
  Top 1.143: 155.94,218.25 155.94,218.75 154.86,219.83
S$42
  Top 1.143: 155.3,219.77 156.13,219.77 156.19,219.83
S$43
  Top 1.143: 158.61,212.78 158.61,213.42 158.1,213.42 | 157.91,213.61 157.91,212.34 | 157.91,213.61 153.59,217.93 152.51,217.93 | 152.51,217.93 151.81,217.93 151.81,218.63 | 163.43,228.02 159.94,228.02 157.34,225.42 157.34,222.82 156.19,221.67 153.72,221.67 151.81,219.77 151.81,218.63 | 159.3,211.26 159.3,212.21 158.1,213.42 | 152.51,217.93 151.81,218.63 | 158.1,213.42 157.91,213.61
S$44
  Top 1.143: 151.05,230.5 151.05,226.06 141.59,216.66
S$45
  Top 1.143: 166.73,252.28 168.38,252.28 168.38,244.34 167.56,244.34 166.61,245.3 166.61,252.28
S$46
  Top 1.143: 167.5,245.04 167.5,251.39
S$47
  Top 1.143: 166.29,253.55 166.03,253.55 165.34,252.85 165.34,251.14 164.89,250.69 164.7,250.69 163.43,251.96 163.43,254.63 164.77,254.63
S$48
  Top 1.143: 167.81,243.07 167.05,243.07 165.34,244.79 165.34,249.11 165.02,249.42 164.19,249.42 162.16,251.46 162.16,255.27 162.86,255.96 168.7,255.96 168.7,259.14
S$49
  Top 1.143: 165.46,254.69 163.43,254.69
S$50
  Top 1.143: 165.84,242.06 165.84,243.71 161.4,248.15 161.4,262.63 163.18,264.41 176,264.41
S$51
  Top 1.143: 178.93,208.78 178.93,209.1 179.69,209.86 179.69,209.93 | 179.69,209.93 186.8,217.04 186.8,223.45 186.16,224.09 186.16,228.41 180.58,234.06 184.2,237.68 184.13,253.23 | 176.26,207.2 176.96,207.2 179.69,209.93
S$52
  Top 1.143: 177.08,264.41 178.04,264.41 182.86,269.23 182.93,269.23 182.99,269.3 182.99,279.9 184.45,281.36
S$53
  Top 1.143: 181.72,279.01 181.72,280.41 182.67,281.36 182.67,281.94
S$54
  Top 1.143: 178.23,259.65 178.23,259.14 180.89,256.47
S$55
  Top 1.143: 178.61,261.17 178.61,262.12 183.43,266.95
S$56
  Top 1.143: 178.86,262.63 178.86,263.46 183.69,268.28
S$57
  Top 1.143: 178.8,263.52 178.8,263.77 183.37,268.35
S$58
  Top 1.143: 153.91,271.27 153.91,270.57 154.8,269.68
S$59
  Top 1.143: 157.72,270.25 157.72,269.17 156.45,267.9
S$60
  Top 1.143: 156.7,268.73 156.7,269.43 157.27,270
S$61
  Top 1.143: 152.7,270.06 152.7,269.93 153.78,268.85 153.78,256.41 153.34,255.96 150.92,255.96 150.86,256.03 150.86,264.22 151.94,265.3 152,265.3 152.06,265.36 152.06,268.73 151.75,269.04
S$62
  Top 1.143: 152,268.73 152,265.3 151.88,265.17
S$63
  Top 1.143: 175.81,208.78 175.81,212.47 180.45,212.47 | 165.78,233.1 179.69,233.1 184.9,227.9 184.9,223.52 185.53,222.88 185.53,217.55 180.45,212.47 | 176.58,208.59 175.81,208.59 | 180.45,212.47 176.58,208.59 | 176.58,208.59 176.45,208.47 175.94,208.47
S$64
  Top 1.143: 146.6,230.44 146.6,231.52 150.73,235.64 153.15,235.64
S$65
  Top 1.143: 129.46,202.94 129.46,202.75 131.81,200.4
S$66
  Top 1.143: 131.81,201.29 131.81,201.8 130.6,203
S$67
  Top 1.143: 131.3,201.16 131.3,200.91 132.25,199.96
S$68
  Top 1.143: 132.38,195.96 132.38,194.88 134.48,192.78 134.48,193.67 132.95,195.19
S$69
  Top 1.143: 144.95,192.59 144.95,192.97 | 144.95,192.59 143.87,191.51 133.84,191.51 131.17,194.18 131.11,194.18 131.05,194.24 131.05,199.26 128.19,202.12 | 144.95,192.59 145.4,193.03
S$70
  Top 1.143: 147.24,192.78 144.7,190.24 | 147.24,192.78 147.24,198.75 | 148,193.54 148,197.93 | 147.24,192.78 148,193.54 | 148,193.54 148.57,194.12 148.57,195.38
S$71
  Top 1.143: 144.51,190.24 133.33,190.24 129.78,193.8 129.78,198.75 126.92,201.61
S$72
  Top 1.143: 129.46,203.64 129.46,209.55 130.35,210.43 130.35,203.89 130.48,203.89 130.48,209.04 130.73,209.29
S$73
  Top 1.143: 133.9,210.24 134.67,210.24 135.75,211.32
S$74
  Top 1.143: 128.19,202.12 128.19,210.12 129.78,211.7 133.65,211.7 | 133.65,211.7 134.22,211.7 134.41,211.9 134.41,215.01 134.79,215.39 142.1,215.39 152.32,225.61 152.32,229.93 | 133.65,211.7 134.35,212.4
S$75
  Top 1.143: 126.92,201.67 126.92,210.69 129.21,212.97 132.38,212.97 | 132.38,212.97 133.14,212.97 133.14,215.58 134.16,216.59 134.22,216.59 134.28,216.66 141.59,216.66 141.72,216.78 | 132.38,212.97 133.08,213.67
S$76
  Top 1.143: 145.14,188.97 132.82,188.97 128.51,193.29 128.51,198.18 125.59,201.1
S$77
  Top 1.143: 125.65,201.48 125.65,211.26 128.51,214.12 128.57,214.12 128.7,214.24 131.87,214.24 131.87,216.09 133.59,217.86 133.78,217.86 133.84,217.93 141.08,217.93 141.72,218.56
S$78
  Top 1.143: 149.59,264.66 150.73,265.81 150.73,266.5
S$79
  Top 1.143: 173.66,238.18 173.78,238.18 174.48,238.88
S$80
  Top 1.143: 174.48,239.52 174.48,238.63 174.04,238.18
S$81
  Top 1.143: 175.18,236.98 175.75,236.98 177.4,238.63 177.4,240.85
S$82
  Top 1.143: 179.56,214.24 180.39,214.24 181.28,215.13
S$83
  Top 1.143: 175.88,229.29 177.97,229.29 181.09,226.18 181.09,222.69 175.69,222.69 175.69,229.1
S$84
  Top 1.143: 158.99,269.68 158.99,268.6 157.59,267.2 157.59,266.25 | 157.59,266.25 157.59,266.19 | 157.59,266.25 160.13,268.79 160.13,269.11
S$85
  Top 1.143: 185.34,280.66 185.34,284.47 183.69,286.13 177.91,286.13
S$86
  Top 1.143: 166.67,288.73 166.67,289.17 167.18,289.68
S$87
  Top 1.143: 167.88,291.59 167.88,291.78 168.58,292.48
S$88
  Top 1.143: 169.15,292.35 175.31,292.35 175.37,292.41
S$89
  Top 1.143: 146.67,197.73 146.67,192.53 144.45,190.31
S$90
  Top 1.143: 130.86,274.06 130.16,274.38 129.14,273.36 129.14,265.23 131.56,262.82
S$91
  Top 1.143: 133.65,229.36 135.75,231.45 135.75,236.34
S$92
  Top 1.143: 131.43,238.44 131.43,239.26 135.62,243.45 139.49,243.45 139.49,241.49 136,241.49 133.4,238.88
S$93
  Top 1.143: 141.21,230.56 141.21,230.63 139.75,232.09 139.75,223.2 | 139.75,223.2 141.08,223.2 141.33,223.45 141.14,223.45 140.83,223.77 140.83,230.31 140.57,230.56 | 139.75,223.2 139.75,222.94 142.03,220.66 142.41,221.04 142.41,223.13 141.91,222.63 141.33,222.63 141.72,222.25 141.72,221.99
S$94
  Top 1.143: 142.41,227.52 142.41,228.41 142.16,228.66
S$95
  Top 1.143: 143.75,243.9 143.75,241.99 | 143.75,243.9 144.13,244.28 144.13,244.22 145.14,243.2 144.89,242.95 144.89,242.88 144.76,242.76 | 143.75,243.9 143.75,244.66 144.06,244.34
S$96
  Top 1.143: 144.19,243.14 145.21,243.14 145.91,242.44 144.64,242.44 144.57,242.38 144.64,242.38 145.21,241.8 144.57,241.8 144.51,241.74 144.51,232.72 146.03,232.72 | 148.32,237.55 148.32,235.01 146.03,232.72 | 146.03,232.85 146.03,242.31 148.32,240.03 148.32,237.55 | 148.32,237.55 148.13,237.36 146.92,237.36 146.86,237.42 146.86,240.85 147.49,240.22 147.49,235.39 146.79,234.69 | 146.79,234.69 146.79,234.44 | 146.79,234.69 146.79,235.52 | 146.03,232.85 146.03,232.72 | 146.03,232.85 145.14,233.74 145.14,241.1 145.27,241.23 144.45,241.23 143.75,241.93 143.75,233.42 144.45,232.72
S$97
  Top 1.143: 139.24,234.18 139.49,234.18 143.18,230.5 143.18,230.44 | 143.87,230.06 142.6,231.33 142.6,232.79 143.94,231.45 144.76,231.45 144.76,229.17 143.43,229.17 143.18,229.42 143.18,230.44 | 143.18,230.44 139.62,233.99
S$98
  Top 1.143: 131.94,257.3 131.94,256.28 131.68,256.03 131.68,249.17 129.08,246.57 129.08,228.02 129.14,227.96 | 129.14,227.96 129.14,228.85 | 129.65,227.45 129.14,227.96 | 129.65,227.45 131.17,225.93 132.13,225.93 134.54,223.52 134.54,224.53 133.52,225.55 134.16,225.55 134.35,225.36 132.76,225.36 130.22,227.9 | 129.65,227.45 129.65,246.25 131.05,247.65 131.05,247.01 130.98,246.95
S$99
  Top 1.143: 144.06,250.31 144.06,250 143.87,249.8 143.87,246.31 145.02,245.17 | 153.02,238.18 152,238.18 146.6,243.58 | 145.02,245.17 145.02,254.06 | 146.6,243.58 145.02,245.17 | 146.6,243.58 146.6,258.95
S$100
  Top 1.143: 176.96,291.46 177.28,291.46 182.04,286.7 180.96,286.7 177.97,289.68 177.97,288.54 179.12,287.4
S$101
  Top 1.143: 143.68,223.32 143.68,222.37 144.76,223.45 144.76,223.39 | 144.76,223.39 144.06,223.39 | 144.76,223.39 148.51,227.13 148.51,228.15 | 143.68,222.31 144.76,223.39
S$102
  Top 1.143: 154.1,212.21 154.1,213.86 152.57,215.39 150.73,215.39 149.27,216.78 149.27,220.78 152.7,224.21 153.46,224.21
S$103
  Top 1.143: 152.95,214.62 152.95,211.96 154.1,210.81
S$104
  Top 1.143: 151.68,212.66 151.68,211.39 153.72,209.35 | 153.72,209.35 153.78,209.29 | 160.32,209.35 153.72,209.35
S$105
  Top 1.143: 148.89,207.13 150.99,207.13 152.45,205.67 152.45,201.61 152.51,201.54 160.32,201.54 164.45,205.67
S$106
  Top 1.143: 151.49,209.55 151.68,209.74 152.64,209.74
S$107
  Top 1.143: 150.16,205.8 150.54,205.8 151.18,205.16 151.18,194.94 150.8,194.56 | 149.84,193.61 145.21,188.97 | 150.8,194.56 149.84,193.61 | 149.84,193.61 149.84,205.86 150.48,205.86 150.8,205.54 150.8,194.56
S$108
  Top 1.143: 142.22,214.05 142.54,214.05
S$109
  Top 1.143: 149.65,221.1 144.7,216.15 145.53,215.32 150.29,215.32
S$110  (via drill 0.6)
  other vias: 147.49,216.91
S$111
  Top 1.143: 150.73,207.58 149.02,209.29 149.02,210.12
S$112
  Top 1.143: 158.42,205.99 160.64,208.21 | 158.42,205.99 156.51,205.99 153.65,208.85 | 150.29,211.26 150.29,209.86 151.3,208.85 153.65,208.85 | 153.65,208.85 159.11,208.85 159.81,208.15 160.19,208.15 | 158.42,205.99 159.94,205.99 161.59,207.64
S$113  (via drill 0.6)
  other vias: 158.03,208.08
S$114
  Top 1.143: 149.97,208.28 150.67,207.58 153.15,207.58 156,204.72 160.51,204.72 162.86,207.07
S$115
  Top 1.143: 153.78,246.95 153.78,245.11 156.89,241.99 153.53,241.99 150.86,244.66 150.86,244.85
S$116
  Top 1.143: 157.72,233.1 154.86,233.1
S$117
  Top 1.143: 156.45,231.83 154.8,231.83
S$118
  Top 1.143: 154.48,230.56 155.18,230.56
S$119
  Top 1.143: 157.78,240.72 158.22,240.72
S$120
  Top 1.143: 185.4,230.69 186.36,231.64
S$121
  Top 1.143: 178.61,205.86 179.56,205.86 188.51,214.82 188.51,230.5 185.85,233.17 185.85,255.01 183.81,257.04 178.8,257.04 178.54,257.3 178.54,260.66 185.34,267.46 185.34,277.81
S$122
  Top 1.143: 184.51,281.3 185.85,279.97
S$123  (via drill 0.6)
  other vias: 157.94,266.84
S$124
  Top 1.143: 145.94,278.84 146.94,278.84 160.94,292.84 161.94,292.84 | 164.94,292.84 163.94,292.84 | 162.94,292.84 161.94,292.84 | 161.94,292.84 148.94,279.84 149.94,279.84 162.94,292.84 | 163.94,292.84 162.94,292.84 | 163.94,292.84 150.94,279.84
S$125  (via drill 0.6)
  other vias: 151.94,274.84
S$126
  Top 1.143: 134.35,278.57 134.98,278.57 | 134.35,278.57 130.35,274.57 | 134.35,278.57 135.37,279.58
S$127
  Top 1.143: 160.89,281.36 160.89,281.55
S$128
  Top 1.143: 158.99,280.66 158.29,279.97
S$129
  Top 1.143: 135.67,279.71 145.57,279.71 157.19,291.33 158.4,291.33 | 159.86,291.33 158.4,291.33 | 158.4,291.33 146.46,279.39
S$130
  Top 1.143: 165.51,292.98 161.13,292.98 160.37,292.22 160.31,292.22 161.13,293.05 165.34,293.05 | 157.91,279.97 159.88,281.94 159.88,283.39 156.83,280.35 155.88,280.35 159.81,284.28 159.81,285.3 154.35,279.84 153.46,279.84 161.4,287.78 161.4,289.11 | 178.99,286.06 177.34,287.71 177.34,291.14 | 176.2,291.65 176.83,291.65 177.34,291.14 | 185.02,279.39 185.4,279.65 186.36,280.6 186.36,284.73 184.39,286.7 | 177.34,291.14 177.34,291.4 175.75,292.98 168.07,292.98 166.8,291.71 | 177.4,292.28 182.99,286.7 184.39,286.7 | 166.67,290.7 164.96,288.98 164.07,288.98 166.8,291.71 | 167.56,291.08 167.43,291.08 166.8,291.71 | 177.08,288.16 178.35,286.89 184.2,286.89 | 184.39,286.7 184.2,286.89 | 166.8,291.71 166.8,290.13 165.84,289.17 161.46,289.17 | 184.2,286.89 178.04,293.05 165.45,293.05 | 165.45,293.05 165.34,293.05 | 165.34,293.05 161.46,289.17 | 166.35,292.67 162.42,288.73 161.02,288.73 | 161.46,289.17 161.4,289.11 | 161.4,289.11 161.02,288.73 | 161.02,288.73 160.45,288.16 | 165.51,292.98 165.58,292.98 | 165.45,293.05 165.51,292.98
S$131
  Top 1.143: 132.67,34.02 132.67,32.88 137.18,28.37 144.29,28.37
S$132
  Top 1.143: 133.94,27.48 133.94,29.77 130.63,33.07 130.06,33.07
S$133
  Top 1.143: 131.4,24.43 131.4,28.62 129.49,30.53 126.95,30.53 125.05,32.43 125.05,34.85 123.84,36.05 123.84,35.04 119.33,30.53 126.89,30.53
S$134
  Top 1.143: 39.67,34.02 39.67,32.88 44.18,28.37 51.29,28.37
S$135
  Top 1.143: 40.94,27.48 40.94,29.77 37.63,33.07 37.06,33.07
S$136
  Top 1.143: 38.4,24.43 38.4,28.62 36.49,30.53 33.95,30.53 32.05,32.43 32.05,34.85 30.84,36.05 30.84,35.04 26.33,30.53 33.89,30.53
S$137
  Top 1.143: 53.32,28.37 57.76,32.82
S$138
  Top 1.143: 55.8,39.55 78.08,39.55 | 55.8,39.55 52.37,36.12 52.37,35.61 | 55.8,39.55 55.86,39.61 77.07,39.61
S$139
  Top 1.143: 74.15,41.26 55.73,41.26 51.1,36.63 51.1,35.1
S$140
  Top 1.143: 61.83,6.27 49.83,6.27 46.02,10.08 46.02,15.29
S$141
  Top 1.143: 56.3,9.13 51.1,9.13 47.29,12.94 | 47.29,12.94 47.29,20.62 | 47.29,12.94 47.29,10.65 49.26,8.69 49.64,8.69
S$142
  Top 1.143: 48.56,14.59 50.78,12.37 | 48.56,14.59 48.56,23.1 | 48.56,14.59 48.56,13.45 50.08,11.92 52.49,11.92
S$143
  Top 1.143: 54.91,24.62 59.29,29 59.8,29
S$144
  Top 1.143: 54.84,24.56 52.75,24.56
S$145
  Top 1.143: 51.1,24.18 51.1,25.45 51.48,25.83 52.3,25.83
S$146
  Top 1.143: 52.49,25.83 54.34,25.83 58.78,30.27
S$147
  Top 1.143: 49.83,24.69 49.83,26.02 50.91,27.1 53.83,27.1 58.27,31.54
S$148
  Top 1.143: 40.94,34.4 40.94,33.45 44.75,29.64 52.81,29.64 57.26,34.09
S$149
  Top 1.143: 47.98,41.39 47.98,44.75
S$150
  Top 1.143: 53.95,47.67 48.24,47.67 47.98,47.42
S$151
  Top 1.143: 47.86,56.88 50.21,56.88 54.02,53.07 54.02,50.41
S$152
  Top 1.143: 74.4,31.54 76.05,31.54 79.86,27.73 79.86,13.77 | 79.86,13.77 80.81,12.81 82.27,12.81 | 79.86,13.77 79.86,12.62 80.75,11.73 84.12,11.73
S$153
  Top 1.143: 73.32,30.27 75.42,30.27 78.59,27.1 78.59,12.11 81.58,9.19 82.15,9.19
S$154
  Top 1.143: 72.11,29 74.85,29 77.32,26.53 77.32,11.61 81.51,7.42 81.83,7.42
S$155
  Top 1.143: 44.56,57.26 44.56,59.74
S$156
  Top 1.143: 41.95,44.37 41.95,44.69 47.98,50.72
S$157
  Top 1.143: 35.98,47.23 41.51,47.23 42.08,47.8
S$158
  Top 1.143: 35.92,50.85 41.45,50.85
S$159
  Top 1.143: 48.56,36.24 48.56,38.98 47.98,39.55 50.46,39.55 48.68,37.77
S$160
  Top 1.143: 36.11,44.69 35.98,44.69
S$161
  Top 1.143: 42.21,35.42 42.21,36.37 41.76,36.82
S$162
  Top 1.143: 43.48,35.74 43.48,36.88 42.27,38.09
S$163
  Top 1.143: 46.02,36.18 46.02,37.9 43.29,40.63 39.92,40.63 35.98,44.56
S$164
  Top 1.143: 44.75,35.86 44.75,37.39 42.78,39.36 38.21,39.36 29.57,48.05
S$165
  Top 1.143: 35.86,23.86 35.86,28.94 35.54,29.26 | 35.54,29.26 33.38,29.26 | 35.54,29.26 35.98,29.26 37.13,28.12 37.13,27.93
S$166
  Top 1.143: 26.01,28.37 26.27,28.12 28.11,28.12 29.25,29.26 | 29.25,29.26 33.32,29.26 | 29.25,29.26 25.06,29.26 24.55,28.75
S$167
  Top 1.143: 42.21,23.23 42.21,10.59 38.4,6.78 32.62,6.78
S$168
  Top 1.143: 43.48,23.04 43.48,10.15 38.97,5.51 34.65,5.51 34.02,4.88 29.76,4.88 26.84,7.8 26.84,9.77 26.9,9.83
S$169
  Top 1.143: 26.01,33.77 23.86,33.77 | 26.01,33.77 28.3,36.05 28.3,37.9 29,38.59 31.92,38.59 34.59,35.93 34.59,33.51 35.03,33.07 36.94,33.07 | 23.92,32.5 24.74,32.5 26.01,33.77
S$170
  Top 1.143: 24.62,33.13 24.3,33.13 24.17,33.26
S$171
  Top 1.143: 32.3,31.23 27.98,31.23 27.86,31.1
S$172
  Top 1.143: 28.81,31.93 32.24,31.93
S$173
  Top 1.143: 31.6,32.69 29.38,32.69 29.12,32.43
S$174
  Top 1.143: 29.89,33.2 30.39,33.2 31.47,34.28
S$175
  Top 1.143: 31.41,33.83 31.41,33.01 31.47,32.94
S$176
  Top 1.143: 24.43,30.53 25.06,30.53 25.06,31.04 | 25.25,31.23 23.98,31.23 | 25.25,31.23 29.57,35.55 29.57,36.63 | 29.57,36.63 29.57,37.32 30.27,37.32 | 39.67,25.7 39.67,29.2 37.06,31.8 34.46,31.8 33.32,32.94 33.32,35.42 31.41,37.32 30.27,37.32 | 22.9,29.83 23.86,29.83 25.06,31.04 | 29.57,36.63 30.27,37.32 | 25.06,31.04 25.25,31.23
S$177
  Top 1.143: 42.14,38.09 37.7,38.09 28.3,47.55
S$178
  Top 1.143: 63.92,22.4 63.92,20.75 55.99,20.75 55.99,21.58 56.94,22.53 63.92,22.53
S$179
  Top 1.143: 56.68,21.64 63.03,21.64
S$180
  Top 1.143: 65.19,22.85 65.19,23.1 64.49,23.8 62.78,23.8 62.34,24.24 62.34,24.43 63.61,25.7 66.27,25.7 66.27,24.37
S$181
  Top 1.143: 54.72,21.32 54.72,22.08 56.43,23.8 60.75,23.8 61.07,24.12 61.07,24.94 63.1,26.97 66.91,26.97 67.61,26.27 67.61,20.43 70.78,20.43
S$182
  Top 1.143: 66.34,23.67 66.34,25.7
S$183
  Top 1.143: 53.7,23.29 55.35,23.29 59.8,27.73 74.27,27.73 76.05,25.96 76.05,13.13
S$184
  Top 1.143: 20.43,10.21 20.74,10.21 21.5,9.45 21.57,9.45 | 21.57,9.45 28.68,2.34 35.1,2.34 35.73,2.97 40.05,2.97 45.7,8.56 49.32,4.94 64.88,5 | 18.84,12.88 18.84,12.18 21.57,9.45
S$185
  Top 1.143: 76.05,12.05 76.05,11.1 80.88,6.27 80.88,6.21 80.94,6.14 91.55,6.14 93.01,4.69
S$186
  Top 1.143: 90.66,7.42 92.05,7.42 93.01,6.46 93.58,6.46
S$187
  Top 1.143: 71.29,10.91 70.78,10.91 68.11,8.24
S$188
  Top 1.143: 72.81,10.53 73.77,10.53 78.59,5.7
S$189
  Top 1.143: 74.27,10.27 75.1,10.27 79.93,5.45
S$190
  Top 1.143: 75.16,10.34 75.42,10.34 79.99,5.77
S$191
  Top 1.143: 82.91,35.23 82.21,35.23 81.32,34.34
S$192
  Top 1.143: 81.89,31.42 80.81,31.42 79.55,32.69
S$193
  Top 1.143: 80.37,32.43 81.07,32.43 81.64,31.86
S$194
  Top 1.143: 81.7,36.44 81.58,36.44 80.5,35.36 68.05,35.36 67.61,35.8 67.61,38.21 67.67,38.28 75.86,38.28 76.94,37.2 76.94,37.13 77,37.07 80.37,37.07 80.69,37.39
S$195
  Top 1.143: 80.37,37.13 76.94,37.13 76.81,37.26
S$196
  Top 1.143: 20.43,13.32 24.11,13.32 24.11,8.69 | 44.75,23.35 44.75,9.45 39.54,4.24 35.16,4.24 34.52,3.61 29.19,3.61 24.11,8.69 | 20.23,12.56 20.23,13.32 | 24.11,8.69 20.23,12.56 | 20.23,12.56 20.11,12.69 20.11,13.19
S$197
  Top 1.143: 42.08,42.53 43.16,42.53 47.29,38.4 47.29,35.99
S$198
  Top 1.143: 14.58,59.68 14.39,59.68 12.04,57.33
S$199
  Top 1.143: 12.93,57.33 13.44,57.33 14.65,58.53
S$200
  Top 1.143: 12.81,57.84 12.55,57.84 11.6,56.88
S$201
  Top 1.143: 7.6,56.76 6.52,56.76 4.42,54.66 5.31,54.66 6.84,56.18
S$202
  Top 1.143: 4.23,44.18 4.62,44.18 | 4.23,44.18 3.15,45.26 3.15,55.29 5.82,57.96 5.82,58.03 5.88,58.09 10.9,58.09 13.76,60.95 | 4.23,44.18 4.68,43.74
S$203
  Top 1.143: 4.42,41.9 1.88,44.44 | 4.42,41.9 10.39,41.9 | 5.19,41.13 9.57,41.13 | 4.42,41.9 5.19,41.13 | 5.19,41.13 5.76,40.56 7.03,40.56
S$204
  Top 1.143: 1.88,44.63 1.88,55.8 5.44,59.36 10.39,59.36 13.25,62.22
S$205
  Top 1.143: 15.28,59.68 21.19,59.68 22.08,58.79 15.54,58.79 15.54,58.66 20.68,58.66 20.93,58.41
S$206
  Top 1.143: 21.89,55.23 21.89,54.47 22.97,53.39
S$207
  Top 1.143: 13.76,60.95 21.76,60.95 23.35,59.36 23.35,55.48 | 23.35,55.48 23.35,54.91 23.54,54.72 26.65,54.72 27.03,54.34 27.03,47.04 37.25,36.82 41.57,36.82 | 23.35,55.48 24.05,54.79
S$208
  Top 1.143: 13.31,62.22 22.33,62.22 24.62,59.93 24.62,56.76 | 24.62,56.76 24.62,55.99 27.22,55.99 28.24,54.98 28.24,54.91 28.3,54.85 28.3,47.55 28.43,47.42 | 24.62,56.76 25.32,56.06
S$209
  Top 1.143: 0.61,43.99 0.61,56.31 4.93,60.63 9.82,60.63 12.74,63.55
S$210
  Top 1.143: 13.12,63.49 22.9,63.49 25.76,60.63 25.76,60.57 25.89,60.44 25.89,57.26 27.73,57.26 29.51,55.55 29.51,55.36 29.57,55.29 29.57,48.05 30.2,47.42
S$211
  Top 1.143: 76.31,39.55 77.45,38.4 78.15,38.4
S$212
  Top 1.143: 49.83,15.48 49.83,15.35 50.53,14.66
S$213
  Top 1.143: 51.16,14.66 50.27,14.66 49.83,15.1
S$214
  Top 1.143: 48.62,13.96 48.62,13.38 50.27,11.73 52.49,11.73
S$215
  Top 1.143: 25.89,9.58 25.89,8.75 26.78,7.86
S$216
  Top 1.143: 146.32,28.37 150.76,32.82
S$217
  Top 1.143: 148.8,39.55 171.08,39.55 | 148.8,39.55 145.37,36.12 145.37,35.61 | 148.8,39.55 148.86,39.61 170.07,39.61
S$218
  Top 1.143: 167.15,41.26 148.73,41.26 144.1,36.63 144.1,35.1
S$219
  Top 1.143: 154.83,6.27 142.83,6.27 139.02,10.08 139.02,15.29
S$220
  Top 1.143: 149.3,9.13 144.1,9.13 140.29,12.94 | 140.29,12.94 140.29,20.62 | 140.29,12.94 140.29,10.65 142.26,8.69 142.64,8.69
S$221
  Top 1.143: 141.56,14.59 143.78,12.37 | 141.56,14.59 141.56,23.1 | 141.56,14.59 141.56,13.45 143.08,11.92 145.49,11.92
S$222
  Top 1.143: 147.91,24.62 152.29,29 152.8,29
S$223
  Top 1.143: 147.84,24.56 145.75,24.56
S$224
  Top 1.143: 144.1,24.18 144.1,25.45 144.48,25.83 145.3,25.83
S$225
  Top 1.143: 145.49,25.83 147.34,25.83 151.78,30.27
S$226
  Top 1.143: 142.83,24.69 142.83,26.02 143.91,27.1 146.83,27.1 151.27,31.54
S$227
  Top 1.143: 133.94,34.4 133.94,33.45 137.75,29.64 145.81,29.64 150.26,34.09
S$228
  Top 1.143: 140.99,41.39 140.99,44.75
S$229
  Top 1.143: 146.95,47.67 141.24,47.67 140.99,47.42
S$230
  Top 1.143: 140.86,56.88 143.21,56.88 147.02,53.07 147.02,50.41
S$231
  Top 1.143: 167.4,31.54 169.05,31.54 172.86,27.73 172.86,13.77 | 172.86,13.77 173.81,12.81 175.28,12.81 | 172.86,13.77 172.86,12.62 173.75,11.73 177.12,11.73
S$232
  Top 1.143: 166.32,30.27 168.42,30.27 171.59,27.1 171.59,12.11 174.58,9.19 175.15,9.19
S$233
  Top 1.143: 165.12,29 167.85,29 170.32,26.53 170.32,11.61 174.51,7.42 174.83,7.42
S$234
  Top 1.143: 137.56,57.26 137.56,59.74
S$235
  Top 1.143: 134.95,44.37 134.95,44.69 140.99,50.72
S$236
  Top 1.143: 128.98,47.23 134.51,47.23 135.08,47.8
S$237
  Top 1.143: 128.92,50.85 134.44,50.85
S$238
  Top 1.143: 141.56,36.24 141.56,38.98 140.99,39.55 143.46,39.55 141.68,37.77
S$239
  Top 1.143: 129.11,44.69 128.98,44.69
S$240
  Top 1.143: 135.21,35.42 135.21,36.37 134.76,36.82
S$241
  Top 1.143: 136.48,35.74 136.48,36.88 135.27,38.09
S$242
  Top 1.143: 139.02,36.18 139.02,37.9 136.29,40.63 132.92,40.63 128.98,44.56
S$243
  Top 1.143: 137.75,35.86 137.75,37.39 135.78,39.36 131.21,39.36 122.57,48.05
S$244
  Top 1.143: 128.86,23.86 128.86,28.94 128.54,29.26 | 128.54,29.26 126.38,29.26 | 128.54,29.26 128.98,29.26 130.13,28.12 130.13,27.93
S$245
  Top 1.143: 119.01,28.37 119.27,28.12 121.11,28.12 122.25,29.26 | 122.25,29.26 126.32,29.26 | 122.25,29.26 118.06,29.26 117.55,28.75
S$246
  Top 1.143: 135.21,23.23 135.21,10.59 131.4,6.78 125.62,6.78
S$247
  Top 1.143: 136.48,23.04 136.48,10.15 131.97,5.51 127.65,5.51 127.02,4.88 122.76,4.88 119.84,7.8 119.84,9.77 119.9,9.83
S$248
  Top 1.143: 119.01,33.77 116.85,33.77 | 119.01,33.77 121.3,36.05 121.3,37.9 122,38.59 124.92,38.59 127.59,35.93 127.59,33.51 128.03,33.07 129.94,33.07 | 116.92,32.5 117.74,32.5 119.01,33.77
S$249
  Top 1.143: 117.62,33.13 117.3,33.13 117.17,33.26
S$250
  Top 1.143: 125.3,31.23 120.98,31.23 120.85,31.1
S$251
  Top 1.143: 121.81,31.93 125.24,31.93
S$252
  Top 1.143: 124.6,32.69 122.38,32.69 122.13,32.43
S$253
  Top 1.143: 122.89,33.2 123.4,33.2 124.47,34.28
S$254
  Top 1.143: 124.41,33.83 124.41,33.01 124.47,32.94
S$255
  Top 1.143: 117.43,30.53 118.06,30.53 118.06,31.04 | 118.25,31.23 116.98,31.23 | 118.25,31.23 122.57,35.55 122.57,36.63 | 122.57,36.63 122.57,37.32 123.27,37.32 | 132.67,25.7 132.67,29.2 130.06,31.8 127.46,31.8 126.32,32.94 126.32,35.42 124.41,37.32 123.27,37.32 | 115.9,29.83 116.85,29.83 118.06,31.04 | 122.57,36.63 123.27,37.32 | 118.06,31.04 118.25,31.23
S$256
  Top 1.143: 135.14,38.09 130.7,38.09 121.3,47.55
S$257
  Top 1.143: 156.92,22.4 156.92,20.75 148.99,20.75 148.99,21.58 149.94,22.53 156.92,22.53
S$258
  Top 1.143: 149.69,21.64 156.03,21.64
S$259
  Top 1.143: 158.19,22.85 158.19,23.1 157.5,23.8 155.78,23.8 155.34,24.24 155.34,24.43 156.61,25.7 159.27,25.7 159.27,24.37
S$260
  Top 1.143: 147.72,21.32 147.72,22.08 149.43,23.8 153.75,23.8 154.07,24.12 154.07,24.94 156.1,26.97 159.91,26.97 160.61,26.27 160.61,20.43 163.78,20.43
S$261
  Top 1.143: 159.34,23.67 159.34,25.7
S$262
  Top 1.143: 146.7,23.29 148.35,23.29 152.8,27.73 167.27,27.73 169.05,25.96 169.05,13.13
S$263
  Top 1.143: 113.43,10.21 113.74,10.21 114.51,9.45 114.57,9.45 | 114.57,9.45 121.68,2.34 128.09,2.34 128.73,2.97 133.05,2.97 138.7,8.56 142.32,4.94 157.88,5 | 111.84,12.88 111.84,12.18 114.57,9.45
S$264
  Top 1.143: 169.05,12.05 169.05,11.1 173.88,6.27 173.88,6.21 173.94,6.14 184.55,6.14 186.01,4.69
S$265
  Top 1.143: 183.66,7.42 185.05,7.42 186.01,6.46 186.58,6.46
S$266
  Top 1.143: 164.29,10.91 163.78,10.91 161.12,8.24
S$267
  Top 1.143: 165.81,10.53 166.77,10.53 171.59,5.7
S$268
  Top 1.143: 167.27,10.27 168.1,10.27 172.93,5.45
S$269
  Top 1.143: 168.16,10.34 168.42,10.34 172.99,5.77
S$270
  Top 1.143: 175.91,35.23 175.21,35.23 174.32,34.34
S$271
  Top 1.143: 174.89,31.42 173.81,31.42 172.54,32.69
S$272
  Top 1.143: 173.37,32.43 174.07,32.43 174.64,31.86
S$273